# Altium PCB Pannel3.5x2 Ver1.0.PcbDoc (part 3 of 4)
Units mil, origin at the board's own origin, x right, y up, seen from the top; angles counter-clockwise.
Board outline 4133.86 x 2283.46 mil, 4 copper layers (SIGNAL, GROUND, PWR, SIGNAL (Bottom)), stack 61.627 mil thick; 222 components, 165 nets, 808 pads, 673 vias.
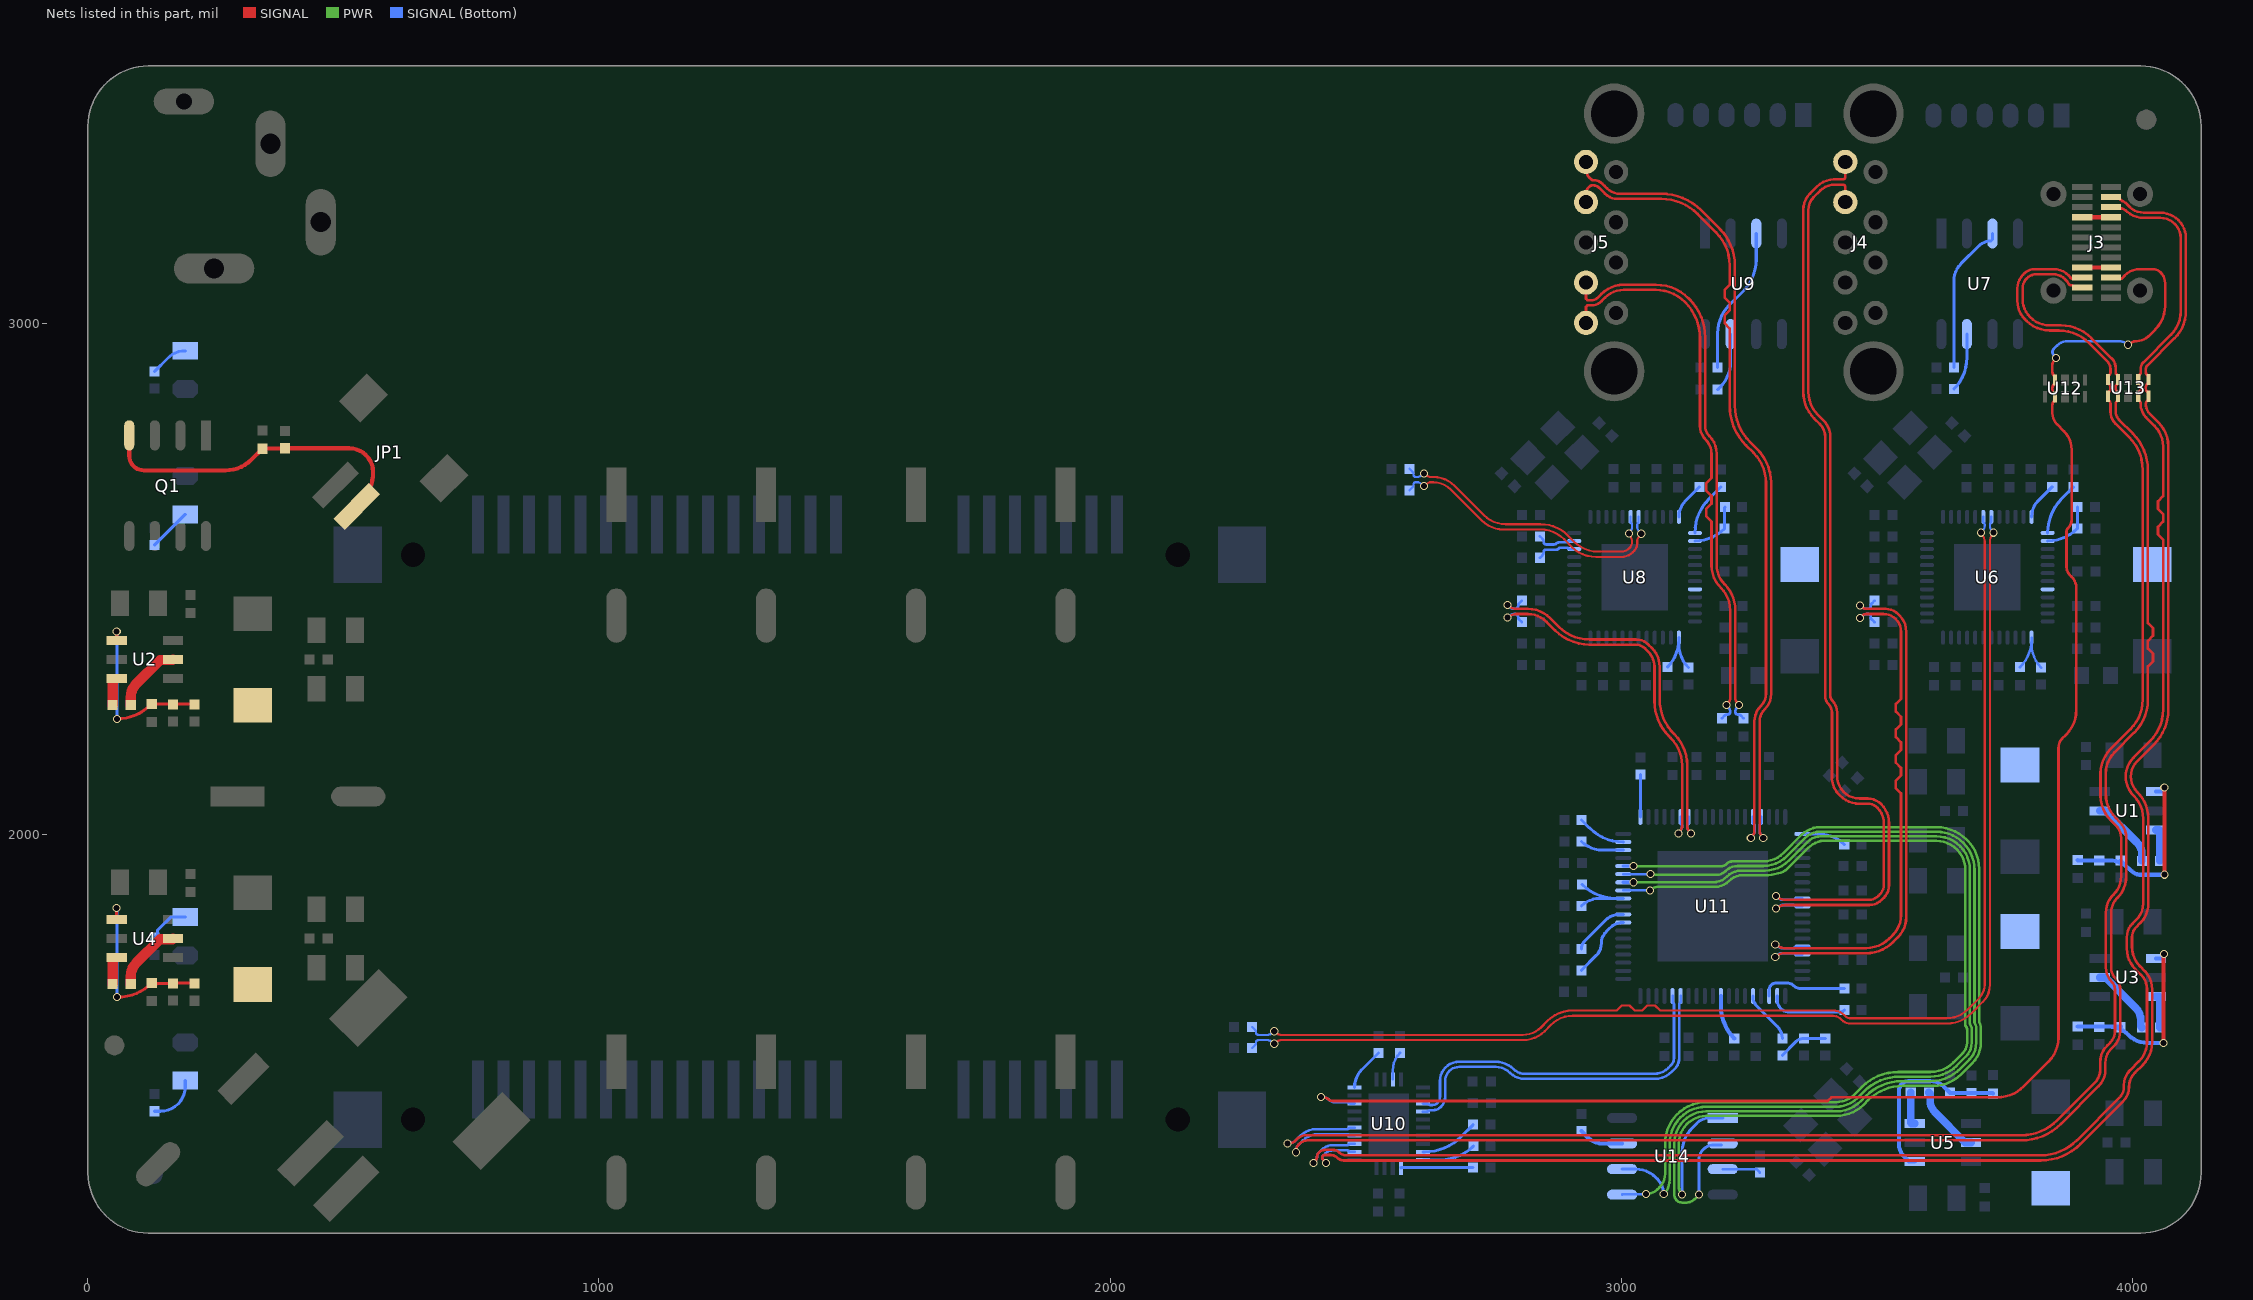
[diagram p5: the nets of this part, all layers, seen from the top]

## Via types
v1: diameter 15.75, hole 11.81, SIGNAL to SIGNAL (Bottom), tented both sides, 673 vias

## Nets (pads, with @x,y where several pads share a name; then routed paths per layer and width w, separated by ;. In a path a pad name is that pad's centre, name@x,y a point inside that pad or via, vN(x,y) a via of type N, cw(c..) or ccw(c..) an arc to the next point about the centre after c; other vN are vias at no path point) (continued)
IN_SSRX2_P: J3.A10 U10.8 U12.4 U12.7 | length 3393
  SIGNAL w5.1: v1(2412.74,1485.74) ccw(c2414.71,1487.71) 2414.71,1484.92 2418.96,1484.92 cw(c2418.96,1473.53) 2427.01,1481.59 ccw(c2435.07,1489.64) 2435.07,1478.25 3403.53,1478.25 3410.83,1485.54 3735.72,1485.54 ccw(c3735.72,1558.36) 3787.18,1506.84 3836.13,1555.79 ccw(c3790.11,1601.8) 3855.19,1601.8 3855.19,2169.64 cw(c3879.98,2169.64) 3862.45,2187.17 3869.71,2194.43 ccw(c3820.49,2243.65) 3869.77,2194.48 ccw(c3820.49,2243.65) 3890.1,2243.65 3890.1,2481.25 ccw(c3857.41,2481.25) 3880.53,2504.36 3877.17,2507.72 ; v1@3846.99,2927.27 ccw(c3855.63,2918.63) 3843.41,2918.63 3843.41,2904.57 ccw(c3853.61,2904.57) 3846.4,2897.36 3846.82,2897.36 3847.51,2896.66 cw(c3845.84,2894.99) 3848.2,2894.99 U12.4@3848.2,2888.78 3848.2,2882.58 cw(c3845.84,2882.58) 3847.51,2880.9 3846.82,2880.21 3846.4,2880.21 ccw(c3853.61,2873) 3843.41,2873 3843.41,2869.58 ccw(c3848.51,2869.58) 3844.91,2865.98 3846.4,2864.48 3846.82,2864.48 cw(c3843.47,2861.13) 3848.2,2861.13 U12.7@3848.2,2855.91 3848.2,2849.7 cw(c3845.84,2849.7) 3847.51,2848.03 3846.82,2847.34 3846.4,2847.34 ccw(c3853.61,2840.12) 3843.41,2840.12 3843.41,2823.49 ccw(c3873.46,2823.49) 3852.21,2802.25 3866.25,2788.21 cw(c3830.65,2752.61) 3881,2752.61 3881,2616.08 cw(c3856.66,2616.08) 3873.86,2598.86 ccw(c3881.08,2591.67) 3870.89,2591.67 3870.89,2522.88 ccw(c3892.34,2522.88) 3877.15,2507.74 ; J3.A10@3958.34,3089.1 3968.74,3089.1 cw(c3968.74,3080.92) 3974.52,3086.71 3975.48,3086.54 3976.57,3086.54 ccw(c3976.57,3091.64) 3980.65,3088.58 cw(c4014.64,3063.51) 4014.64,3105.75 4040.17,3105.75 cw(c4040.17,3085.55) 4054.45,3099.83 4055.38,3098.91 cw(c4035.04,3078.57) 4063.8,3078.57 4063.8,3033.82 cw(c3999.05,3033.82) 4044.83,2988.04 4031.13,2974.33 cw(c4008.36,2997.1) 4008.36,2964.9 4008.27,2964.9 ccw(c4008.27,2943.27) 4006.1,2964.79 ccw(c4008.27,2943.27) 3992.97,2958.56 cw(c3991,2960.54) v1(3991,2957.75)
  SIGNAL (Bottom) w5.1: v1@2418.62,1484.92 cw(c2418.62,1472.71) 2425.2,1483 cw(c2418.62,1472.71) 2427.25,1481.35 2428.04,1480.55 ccw(c2438.57,1491.09) 2428.7,1479.94 ccw(c2438.57,1491.09) 2438.57,1476.19 2463.4,1476.19 cw(c2463.4,1471.37) 2466.81,1474.78 ccw(c2470.23,1478.19) 2470.23,1473.37 U10.8@2478.07,1473.37 ; v1@3849.75,2933.97 cw(c3847.77,2932) v1(3850.57,2932) ; v1@3849.75,2933.97 3845.78,2937.94 cw(c3851.51,2943.67) 3843.51,2942.42 cw(c3851.51,2943.67) 3843.41,2943.67 cw(c3851.51,2943.67) 3845.78,2949.38 3852.37,2955.98 cw(c3873.93,2934.38) 3873.93,2964.9 3973.73,2964.9 cw(c3973.73,2943.27) 3989.03,2958.56 ccw(c3991,2960.54) v1(3991,2957.75)
IN_SSTX1_N: J3.A3 U10.3 U13.2 U13.9 | length 3713.3
  SIGNAL w5.1: v1(2397.59,1357) cw(c2400.38,1357) v1@2398.41,1358.97 ; v1@2398.41,1358.97 2401.77,1362.34 ccw(c2394.6,1369.52) 2404.75,1369.52 cw(c2414.89,1369.52) 2407.71,1376.69 2409.24,1378.22 cw(c2419.88,1367.58) 2419.88,1382.62 2435.73,1382.62 cw(c2435.73,1364.49) 2448.55,1377.31 ccw(c2461.37,1390.14) 2461.37,1372 3820.32,1372 ccw(c3820.32,1472) 3891.03,1401.29 3974.48,1484.74 ccw(c3953.57,1505.64) 3983.14,1505.64 3983.14,1509.83 cw(c4022.81,1509.83) 3994.74,1537.86 ; J3.A3@3958.34,3226.9 ccw(c3961.21,3229.77) 3961.21,3225.71 3970.7,3225.71 cw(c3970.7,3198.75) 3989.77,3217.81 3989.82,3217.76 3989.88,3217.76 ccw(c4021.97,3255.67) 4021.97,3206 4054.42,3206 cw(c4054.42,3165.98) 4082.7,3194.3 cw(c4054.42,3165.98) 4094.45,3165.98 4094.45,3023.58 cw(c4029.42,3023.58) 4075.4,2977.6 4021.28,2923.48 ccw(c4033.78,2910.99) 4016.11,2910.99 4016.11,2903.55 cw(c4011.01,2903.55) 4014.61,2899.94 4013.12,2898.45 4012.7,2898.45 ccw(c4016.05,2895.1) 4011.31,2895.1 U13.2@4011.31,2889.87 4011.31,2883.67 ccw(c4013.68,2883.67) 4012.01,2882 4012.7,2881.3 4013.12,2881.3 cw(c4005.91,2874.09) 4016.11,2874.09 4016.11,2870.67 cw(c4011.01,2870.67) 4014.61,2867.07 4013.12,2865.57 4012.7,2865.57 ccw(c4016.05,2862.22) 4011.31,2862.22 U13.9@4011.31,2857 4011.31,2850.8 ccw(c4013.68,2850.8) 4012.01,2849.12 4012.7,2848.43 U13.9@4013.12,2848.43 ; 3994.76,1537.88 4012.94,1556.06 ccw(c3975.74,1593.26) 4028.35,1593.26 4028.35,1697.27 ccw(c3988.8,1697.27) 4016.78,1725.22 ; 4002,2076 cw(c4039.01,2112.94) 3986.72,2112.94 3986.72,2113.03 cw(c4039.04,2113.03) 3986.72,2113.13 cw(c4039.04,2113.03) 4002.03,2150.02 ; 4002.03,2075.97 cw(c3956.24,2030.18) 4021,2030.18 4021,1864.73 cw(c3976.47,1864.73) 4007.97,1833.25 3999.97,1825.25 ccw(c4026.46,1798.77) 3999.91,1825.19 ccw(c4026.46,1798.77) 3989,1798.85 ccw(c4026.46,1798.77) 3989,1798.77 3989,1775.88 ccw(c4044.25,1775.88) 4005.18,1736.82 4016.77,1725.23 ; 4002.04,2150.03 4034.51,2182.49 ccw(c3972.96,2244.04) 4060,2244.04 4060,2561.5 4060,2576.5 4050,2586.5 4050,2601.5 4060,2611.5 4060,2626.5 4050,2636.5 4050,2651.5 4060,2661.5 4060,2705 4060,2758.7 ccw(c4003.2,2758.7) 4043.37,2798.85 4026.73,2815.49 ; U13.9@4013.12,2848.42 cw(c4005.91,2841.22) 4016.11,2841.22 4016.11,2841.14 ccw(c4052.38,2841.14) 4026.7,2815.52
  SIGNAL (Bottom) w5.1: v1@2401.77,1362.34 ccw(c2394.6,1369.52) 2404.75,1369.52 cw(c2414.89,1369.52) 2407.71,1376.69 2413.82,1382.79 cw(c2435.59,1361.02) 2435.59,1391.81 2463.41,1391.81 ccw(c2463.41,1396.62) U10.3@2466.81,1393.21 ; U10.3@2466.83,1393.23 cw(c2470.22,1389.82) 2470.22,1394.63 U10.3@2478.07,1394.63
IN_SSTX1_P: J3.A2 U10.2 U13.1 U13.10 | length 3698
  SIGNAL w5.1: v1@2421.18,1358.97 cw(c2419.21,1357) v1(2422,1357) ; v1@2421.18,1358.97 2416.34,1363.82 cw(c2419.95,1367.42) 2414.85,1367.42 cw(c2419.95,1367.42) 2416.34,1371.03 cw(c2419.95,1367.42) 2419.95,1372.52 2431.54,1372.52 cw(c2431.54,1354.39) 2444.37,1367.21 ccw(c2457.19,1380.04) 2457.19,1361.9 3820.38,1361.9 ccw(c3820.38,1471.87) 3898.14,1394.11 3981.69,1477.66 ccw(c3953.79,1505.56) 3993.24,1505.56 3993.24,1505.64 cw(c4032.91,1505.64) 4004.86,1533.69 4020.16,1549 ccw(c3976.01,1593.15) 4038.45,1593.15 4038.45,1697.33 ccw(c3988.96,1697.33) 4023.96,1732.33 4015.28,1741 ; J3.A2@3958.34,3246.58 3961.66,3246.58 cw(c3961.66,3221.33) 3979.52,3239.18 cw(c3978.03,3232.81) 3981.58,3238.31 3986.69,3235.01 cw(c3983.93,3230.73) 3987.53,3234.33 3989.83,3232.04 cw(c3986.2,3228.45) 3990.09,3231.76 ccw(c4014.64,3252.49) 3991.86,3229.82 ccw(c4014.64,3252.49) 3991.97,3229.71 ccw(c4014.64,3252.49) 3993.25,3228.51 cw(c3989.84,3224.71) 3993.37,3228.39 3994.01,3227.78 3993.95,3227.73 ccw(c4022.03,3255.8) 4022.03,3216.1 4054.56,3216.1 cw(c4054.56,3166.31) 4089.77,3201.52 4089.96,3201.33 cw(c4054.74,3166.11) 4104.55,3166.11 4104.55,3023.46 cw(c4029.7,3023.46) 4082.62,2970.54 4028.47,2916.38 ccw(c4033.93,2910.93) 4026.21,2910.93 4026.21,2903.55 ccw(c4031.31,2903.55) 4027.7,2899.94 4029.2,2898.45 4029.61,2898.45 cw(c4026.26,2895.1) 4031,2895.1 U13.1@4031,2889.87 4031,2883.67 cw(c4028.63,2883.67) 4030.31,2882 4029.61,2881.3 4029.2,2881.3 ccw(c4036.41,2874.09) 4026.21,2874.09 4026.21,2870.67 ccw(c4031.31,2870.67) 4027.7,2867.07 4029.2,2865.57 4029.61,2865.57 cw(c4026.26,2862.22) 4031,2862.22 U13.10@4031,2857 4031,2850.8 cw(c4028.63,2850.8) 4030.31,2849.12 4029.61,2848.43 U13.10@4029.2,2848.43 ; 4009.21,2083.07 cw(c4039.14,2112.99) 3996.82,2112.99 cw(c4039.14,2112.99) 4009.21,2142.92 4041.67,2175.38 ccw(c3973.05,2244) 4041.76,2175.46 ccw(c3973.05,2244) 4070.1,2244 4070.1,2758.85 ccw(c4003.58,2758.85) 4050.62,2805.89 4033.93,2822.58 ; 4009.25,2083.04 cw(c3956.42,2030.25) 4031.1,2030.25 4031.1,1864.62 cw(c3976.74,1864.62) 4015.18,1826.18 4007.14,1818.14 ccw(c4026.55,1798.73) 3999.1,1798.73 3999.1,1780.07 ccw(c4054.35,1780.07) 4015.26,1741.03 ; U13.10@4029.19,2848.42 ccw(c4036.41,2841.22) 4026.21,2841.22 ccw(c4052.57,2841.22) 4033.91,2822.59
  SIGNAL (Bottom) w5.1: 2416.33,1363.82 cw(c2419.95,1367.42) 2414.85,1367.42 cw(c2419.95,1367.42) 2416.33,1371.03 2420.93,1375.62 cw(c2435.63,1360.93) 2435.63,1381.71 2463.41,1381.71 cw(c2463.41,1376.9) U10.2@2466.81,1380.31 ; U10.2@2466.83,1380.29 ccw(c2470.22,1383.7) 2470.22,1378.89 U10.2@2478.07,1378.89
IN_SSTX2_N: J3.B2 U10.4 U13.4 U13.7 | length 3673.7
  SIGNAL w5.1: v1(2364,1378) ccw(c2362.03,1379.97) 2364.82,1379.97 2364.82,1383.88 cw(c2377.03,1383.88) 2368.4,1392.51 2370.92,1395.04 cw(c2385.66,1380.3) 2385.66,1401.14 3782.08,1401.14 ccw(c3782.08,1511.12) 3859.84,1433.35 3933.9,1507.42 ccw(c3902.28,1539.04) 3947,1539.04 3947,1553.37 cw(c3984.74,1553.37) 3958.03,1580.03 3964.07,1586.07 ccw(c3935.33,1614.81) 3975.97,1614.81 3975.97,1696.39 ccw(c3945.46,1696.39) 3967.06,1717.94 ; 3799.71,3011.7 cw(c3835.24,3047.22) 3785,3047.22 3785,3068.03 cw(c3812.62,3068.03) 3793.09,3087.56 cw(c3812.62,3068.03) 3812.62,3095.65 3845.35,3095.65 cw(c3845.35,3063.51) 3868.06,3086.26 cw(c3845.35,3063.51) 3868.11,3086.21 cw(c3845.35,3063.51) 3871.81,3081.76 3875.47,3076.45 ; 3799.74,3011.67 ccw(c3838.13,3050.11) 3838.13,2995.79 3859.88,2995.79 cw(c3859.88,2911.79) 3919.27,2971.19 3959.42,2931.03 cw(c3940.75,2912.37) 3967.15,2912.37 3967.15,2903.55 ccw(c3972.25,2903.55) 3968.65,2899.94 3970.14,2898.45 3970.56,2898.45 cw(c3967.21,2895.1) 3971.94,2895.1 U13.4@3971.94,2889.87 3971.94,2883.67 cw(c3969.58,2883.67) 3971.25,2882 3970.56,2881.3 3970.14,2881.3 ccw(c3977.35,2874.09) 3967.15,2874.09 3967.15,2870.67 ccw(c3972.25,2870.67) 3968.65,2867.07 3970.14,2865.57 3970.56,2865.57 cw(c3967.21,2862.22) 3971.94,2862.22 U13.7@3971.94,2857 3971.94,2850.8 cw(c3969.58,2850.8) 3971.25,2849.12 3970.56,2848.43 U13.7@3970.14,2848.43 ; 3875.48,3076.45 ccw(c3879.7,3079.31) 3879.7,3074.21 cw(c3879.7,3066.03) J3.B2@3885.47,3071.83 ; J3.B2@3885.49,3071.8 ccw(c3891.26,3077.6) 3891.26,3069.42 J3.B2@3901.65,3069.42 ; 3964.58,2159.95 ccw(c4005.58,2119) 3947.63,2119 3947.63,2080.12 ccw(c4016.37,2080.12) 3967.77,2031.52 3974.93,2024.36 cw(c3943.61,1993.04) 3987.9,1993.04 3987.9,1918.11 cw(c3927.02,1918.11) 3970.13,1875.13 cw(c3927.02,1918.11) 3970.07,1875.07 ccw(c3998.96,1846.18) 3958.1,1846.18 3958.1,1739.54 ccw(c3988.61,1739.54) 3967.02,1717.98 ; 3964.61,2159.98 4003.42,2198.78 ccw(c3938.99,2263.21) 4030.1,2263.21 4030.1,2313.5 4030.1,2328.5 4040.1,2338.5 4040.1,2353.5 4030.1,2363.5 4030.1,2378.5 4040.1,2388.5 4040.1,2403.5 4030.1,2413.5 4030.1,2428.5 4030.1,2713 ccw(c3929.75,2713) 4000.71,2783.96 3974.05,2810.62 ; U13.7@3970.14,2848.42 ccw(c3977.35,2841.22) 3967.15,2841.22 3967.15,2827.27 ccw(c3990.71,2827.27) 3974.04,2810.63
  SIGNAL (Bottom) w5.1: v1@2364.82,1383.88 cw(c2377.03,1383.88) 2368.4,1392.51 2376.95,1401.07 cw(c2406.25,1371.78) 2406.25,1413.2 2463.4,1413.2 cw(c2463.4,1408.38) 2466.81,1411.79 ccw(c2470.23,1415.2) 2470.23,1410.38 U10.4@2478.07,1410.38
IN_SSTX2_P: J3.B3 U10.5 U13.5 U13.6 | length 3671.4
  SIGNAL w5.1: v1(2346.74,1395.26) cw(c2348.71,1393.29) 2348.71,1396.08 2352.62,1396.08 ccw(c2352.62,1408.29) 2361.25,1399.65 2365.26,1403.66 cw(c2383.57,1385.35) 2383.57,1411.24 3782.02,1411.24 ccw(c3782.02,1511.24) 3852.73,1440.53 3926.73,1514.53 ccw(c3902.17,1539.09) 3936.9,1539.09 3936.9,1553.47 cw(c3984.48,1553.47) 3950.84,1587.12 3956.86,1593.15 ccw(c3935.12,1614.89) 3965.87,1614.89 3965.87,1696.3 ccw(c3945.25,1696.3) 3959.83,1710.88 ; 3790.21,3006.92 3792.63,3004.49 ccw(c3838.04,3049.9) 3838.04,2985.69 3855.69,2985.69 cw(c3855.69,2901.69) 3915.09,2961.09 3950.8,2925.37 cw(c3935.7,2910.28) 3957.05,2910.28 3957.05,2903.55 cw(c3951.95,2903.55) 3955.56,2899.94 3954.06,2898.45 3953.65,2898.45 ccw(c3957,2895.1) 3952.26,2895.1 U13.5@3952.26,2889.87 3952.26,2883.67 ccw(c3954.63,2883.67) 3952.95,2882 3953.65,2881.3 3954.06,2881.3 cw(c3946.85,2874.09) 3957.05,2874.09 3957.05,2870.67 cw(c3951.95,2870.67) 3955.56,2867.07 3954.06,2865.57 3953.65,2865.57 ccw(c3957,2862.22) 3952.26,2862.22 U13.6@3952.26,2857 3952.26,2850.8 ccw(c3954.63,2850.8) 3952.95,2849.12 3953.65,2848.43 U13.6@3954.06,2848.43 ; 3790.2,3006.93 cw(c3827.18,3043.89) 3774.9,3043.89 3774.9,3068.12 cw(c3812.4,3068.12) 3785.88,3094.64 3788.91,3097.66 cw(c3808.43,3078.13) 3808.43,3105.75 3845.35,3105.75 cw(c3845.35,3063.51) 3875.17,3093.43 cw(c3845.35,3063.51) 3875.27,3093.33 cw(c3845.35,3063.51) 3879.31,3088.64 ccw(c3883.43,3091.64) 3883.43,3086.54 3884.52,3086.54 3885.48,3086.7 cw(c3891.26,3080.92) 3891.26,3089.1 J3.B3@3901.65,3089.1 ; U13.6@3954.07,2848.42 cw(c3946.85,2841.22) 3957.05,2841.22 3957.05,2827.19 ccw(c3990.52,2827.19) 3966.83,2803.55 3993.43,2776.96 ; 3959.82,1710.89 cw(c3988.4,1739.45) 3948,1739.45 3948,1846.28 cw(c3998.7,1846.28) 3962.85,1882.13 3962.9,1882.18 ccw(c3926.93,1918.15) 3977.8,1918.15 3977.8,1992.97 ccw(c3943.43,1992.97) 3967.76,2017.24 3957.67,2027.33 cw(c4006.27,2075.94) 3937.53,2075.94 3937.53,2119.08 cw(c4005.38,2119.08) 3937.53,2119.2 cw(c4005.38,2119.08) 3957.37,2167.02 cw(c4005.38,2119.08) 3957.41,2167.06 3996.17,2205.83 ccw(c3938.65,2263.35) 4020,2263.35 4020,2712.8 ccw(c3929.28,2712.8) 3993.46,2776.92
  SIGNAL (Bottom) w5.1: v1@2352.62,1396.08 ccw(c2352.62,1408.29) 2361.25,1399.65 2371.29,1409.69 cw(c2404.16,1376.83) 2404.16,1423.3 2463.4,1423.3 ccw(c2463.4,1428.13) 2466.81,1424.72 cw(c2470.23,1421.31) 2470.23,1426.13 U10.5@2478.07,1426.13
LXO-B: L6.1 U6.44
LXO-C: L7.1 U8.44
NetC3_1: C3.1 U1.6 | length 67.5
  SIGNAL (Bottom) w15: U1.6@4046,2008.6 4052.36,2008.6 4053.72,2007.24 C3.1@4053.72,1948
NetC3_2: C3.2 L1.1 U1.2 | length 137
  SIGNAL (Bottom) w15: U1.2@3936,2046 3946.83,2046 4008.9,1983.93 ; 4008.92,1983.91 cw(c3986.24,1961.27) 4018.28,1961.27 C3.2@4018.28,1948
NetC4_1: C4.1 U2.6 | length 50.5
  SIGNAL w20: C4.1@48.57,2253 U2.6@48.57,2303.46
NetC4_2: C4.2 L2.1 U2.2 | length 135.9
  SIGNAL w20: C4.2@84,2253 84,2268.3 cw(c120.93,2268.3) 94.81,2294.4 141.27,2340.86 165.52,2340.86 U2.2@166.67,2342
NetC9_1: C9.1 R1.2 R3.1 U1.4 | length 391.8
  SIGNAL w8: v1(4062.21,2091.65) 4062.39,2091.47 4062.39,1921.11 v1(4062.57,1920.93)
  SIGNAL (Bottom) w8: C9.1@3893,1949.72 3893.56,1949.16 3954,1949.16 cw(c3954,1894.98) 3992.29,1933.31 ; R3.1@3977,1948.61 3992.29,1933.31 ; U1.4@4046,2083.4 4056.83,2083.4 4062.21,2088.79 v1(4062.21,2091.65) ; v1(4062.57,1920.93) 4014.89,1920.93 cw(c4014.89,1943.11) 4012.13,1921.1 cw(c4014.89,1943.11) 3999.2,1927.43 cw(c4026,1965.82) 3992.89,1932.71 3992.31,1933.29
NetC10_1: C10.1 R2.2 R4.1 U2.4 | length 349.4
  SIGNAL w6: v1(56.52,2397.07) 56.52,2379.54 U2.4@56.67,2379.4 ; v1(57,2226) ccw(c57,2320.19) 102.11,2237.51 ccw(c57,2320.19) 117.67,2248.14 ccw(c57,2320.19) C10.1@123.58,2253.57 ; C10.1@123.6,2253.59 C10.1@125,2254.98 207.89,2254.98 R4.1@209,2253.87
  SIGNAL (Bottom) w6: v1(56.52,2397.07) 56.76,2396.83 56.76,2226.24 v1(57,2226)
NetC17_1: C17.1 U3.6 | length 67.5
  SIGNAL (Bottom) w15: U3.6@4046,1682.6 4052.36,1682.6 4053.72,1681.24 C17.1@4053.72,1622
NetC17_2: C17.2 L3.1 U3.2 | length 137
  SIGNAL (Bottom) w15: U3.2@3936,1720 3946.83,1720 4006.56,1660.27 ; 4006.58,1660.25 cw(c3983.9,1637.61) 4015.94,1637.61 4015.94,1624.34 C17.2@4018.28,1622
NetC18_1: C18.1 U4.6 | length 50.5
  SIGNAL w20: C18.1@48.57,1707 U4.6@48.57,1757.46
NetC18_2: C18.2 L4.1 U4.2 | length 135.9
  SIGNAL w20: C18.2@84,1707 84,1722.3 cw(c120.93,1722.3) 94.81,1748.4 141.27,1794.86 165.52,1794.86 U4.2@166.67,1796
NetC23_1: C23.1 R5.2 R7.1 U3.4 | length 395.4
  SIGNAL w8: v1(4060.33,1592) 4061.01,1592.68 4061.01,1764.98 v1(4061.69,1765.66)
  SIGNAL (Bottom) w8: C23.1@3893,1623.72 3952.67,1623.72 ; R7.1@3977,1623.72 3952.67,1623.72 ; U3.4@4046,1757.4 4056.83,1757.4 4061.69,1762.26 v1(4061.69,1765.66) ; v1(4060.33,1592) 4029.25,1592 cw(c4029.25,1644.25) 3992.31,1607.29 ccw(c3952.67,1567.67) 3952.67,1623.72
NetC24_1: C24.1 R6.2 R8.1 U4.4 | length 365.8
  SIGNAL w6: v1(55.87,1855.98) 55.87,1834.19 U4.4@56.67,1833.4 ; v1(56.94,1681.29) 58.14,1681.29 ccw(c58.14,1775.84) 104.48,1693.42 ccw(c58.14,1775.84) C24.1@117.93,1702.59 ; C24.1@125,1708.98 cw(c58.14,1775.84) C24.1@117.93,1702.59 ; R6.2@167,1708 141.63,1708 ccw(c141.63,1653.37) C24.1@117.93,1702.59 ; R6.2@167,1708.98 207.89,1708.98 R8.1@209,1707.87
  SIGNAL (Bottom) w6: v1(55.87,1855.98) 56.94,1854.91 v1(56.94,1681.29)
NetC30_1: C30.1 U5.6 | length 67.5
  SIGNAL (Bottom) w15: C30.1@3566.28,1495 3566.28,1435.76 3567.64,1434.4 U5.6@3574,1434.4
NetC30_2: C30.2 L5.1 U5.2 | length 137
  SIGNAL (Bottom) w15: C30.2@3601.72,1495 3604.06,1492.66 3604.06,1479.39 ccw(c3636.1,1479.39) 3613.42,1456.75 ; 3613.44,1456.73 3673.17,1397 U5.2@3684,1397
NetC33_1: C33.1 R9.2 R10.1 U5.4 | length 358.9
  SIGNAL (Bottom) w8: U5.4@3574,1359.6 3563.17,1359.6 3553.19,1369.58 cw(c3577.29,1393.67) 3543.21,1393.67 3543.21,1498.28 cw(c3561.92,1498.28) 3548.69,1511.51 cw(c3561.92,1498.28) 3561.92,1516.99 3604.44,1516.99 cw(c3604.44,1478.42) 3631.7,1505.69 R10.1@3643,1494.39 3643.56,1493.84 3726.44,1493.84 C33.1@3727,1493.28
NetC36_2: C36.2 JP1.1 Q1.4 R11.2 | length 651.5
  SIGNAL w8: Q1.4@81,2780.43 81,2740.45 ccw(c109.45,2740.45) 89.33,2720.33 ccw(c109.45,2740.45) 109.45,2712 269.15,2712 ccw(c269.15,2784.18) 320.15,2733.11 ccw(c269.15,2784.18) 320.19,2733.14 C36.2@341.33,2754.28 341.82,2754.78 384.84,2754.78 R11.2@385.33,2755.27 511.45,2755.27 cw(c511.45,2708.72) 544.36,2741.64 ; JP1.1@526.13,2641.37 532.91,2648.16 ccw(c472.35,2708.72) 554.5,2684.5 ccw(c472.35,2708.72) 558,2708.72 ccw(c511.45,2708.72) 544.4,2741.6
NetC45_2: C45.2 R16.2 U6.38 | length 106.6
  SIGNAL (Bottom) w6: U6.38@3834.11,2573.87 ccw(c3834.11,2655.37) 3891.74,2597.74 ccw(c3889.04,2600.44) 3892.86,2600.44 R16.2@3892.86,2640
NetC48_1: C48.1 R18.2 U6.1 | length 124.4
  SIGNAL (Bottom) w5: C48.1@3780,2327 ccw(c3725.4,2381.6) U6.1@3802.61,2381.6 ; U6.1@3802.61,2384.89 U6.1@3802.61,2381.6 ; R18.2@3821.39,2326.14 cw(c3866.7,2371.46) 3802.61,2371.46 U6.1@3802.61,2381.6
NetC67_2: C67.2 R22.2 U8.38 | length 106.6
  SIGNAL (Bottom) w6: U8.38@3144.11,2573.87 ccw(c3144.11,2655.37) 3201.74,2597.74 C67.2@3202,2598 3202,2637.93 cw(c3204.93,2637.93) R22.2@3202.86,2640
NetC70_1: C70.1 R24.2 U8.1 | length 124.4
  SIGNAL (Bottom) w6: C70.1@3090,2327 ccw(c3035.4,2381.6) U8.1@3112.61,2381.6 ; U8.1@3112.61,2384.89 U8.1@3112.61,2381.6 ; R24.2@3131.39,2326.14 cw(c3176.7,2371.46) 3112.61,2371.46 U8.1@3112.61,2381.6
NetC91_1: C91.1 R30.1 U11.68 | length 158.9
  SIGNAL (Bottom) w6: R30.1@2922,1860 cw(c2957.49,1824.51) 2957.49,1874.7 U11.68@2988.91,1874.7 ; C91.1@2923,1902 ccw(c2988.91,1967.91) U11.68@2988.91,1874.7 ; U11.68@3003.8,1874.7 U11.68@2988.91,1874.7
NetJ3_A4: J3.A4 J3.B9 | length 56.7
  SIGNAL w8: J3.B9@3901.65,3207.21 J3.A4@3958.34,3207.21
NetJ3_A9: J3.A9 J3.B4 | length 56.7
  SIGNAL w8: J3.B4@3901.65,3108.79 J3.A9@3958.34,3108.79
NetLED1_1: LED1.1 R12.2 | length 81.9
  SIGNAL (Bottom) w6: R12.2@130.61,1797.71 136.37,1803.47 136.37,1812.37 141.65,1817.65 161.94,1837.94 LED1.1@190.62,1837.94
NetLED2_1: LED2.1 R13.2 | length 99
  SIGNAL (Bottom) w6: R13.2@130.61,1458.25 142.19,1458.25 ccw(c142.19,1506.67) 176.43,1472.43 ccw(c142.19,1506.67) 190.61,1506.67 LED2.1@190.61,1518.03
NetLED3_1: LED3.1 R14.2 | length 74.6
  SIGNAL (Bottom) w6: R14.2@130.61,2905.71 156.82,2931.91 ; 156.83,2931.93 cw(c190.62,2898.11) 160.5,2935.23 cw(c190.62,2898.11) LED3.1@190.62,2945.92
NetLED4_1: LED4.1 R15.2 | length 84.7
  SIGNAL (Bottom) w6: R15.2@130.85,2566.25 130.85,2566.48 137.46,2573.09 137.69,2573.09 LED4.1@190.61,2626.01
NetR17_2: R17.2 U6.37 | length 107.2
  SIGNAL (Bottom) w6: U6.37@3834.11,2589.61 cw(c3929.12,2589.61) 3861.94,2656.79 R17.2@3885,2679.86
NetR19_2: R19.2 U6.36 | length 73.6
  SIGNAL (Bottom) w6: U6.36@3802.61,2621.11 cw(c3846.94,2621.11) 3815.6,2652.45 R19.2@3843,2679.86
NetR20_2: R20.2 U7.7 | length 114.4
  SIGNAL (Bottom) w6: R20.2@3650.46,2871 ccw(c3588.82,2932.65) 3676,2932.65 U7.7@3676,2978.57
NetR21_2: R21.2 U7.3 | length 298.5
  SIGNAL (Bottom) w6: R21.2@3650.46,2913 3650.46,3081.65 cw(c3700.35,3081.65) 3665.05,3116.9 ; 3665.08,3116.92 3698.77,3150.62 cw(c3723.3,3126.09) 3709.89,3158.08 cw(c3723.3,3126.09) 3723.3,3160.78 3726,3163.48 U7.3@3726,3175.43
NetR23_2: R23.2 U8.37 | length 107.2
  SIGNAL (Bottom) w6: U8.37@3144.11,2589.61 cw(c3239.12,2589.61) 3171.94,2656.79 R23.2@3195,2679.86
NetR25_2: R25.2 U8.36 | length 73.6
  SIGNAL (Bottom) w6: U8.36@3112.61,2621.11 cw(c3156.94,2621.11) 3125.6,2652.45 R25.2@3153,2679.86
NetR26_2: R26.2 U9.7 | length 116.1
  SIGNAL (Bottom) w6: R26.2@3188.46,2870 3193.17,2874.7 ccw(c3142.87,2925) 3214,2925 U9.7@3214,2978.57
NetR27_1: R27.1 U9.3 | length 286.5
  SIGNAL (Bottom) w6: R27.1@3188.46,2913 3188.46,2980 cw(c3266.84,2980) 3211.4,3035.4 3238,3062 ccw(c3175.23,3124.77) 3264,3124.77 U9.3@3264,3175.43
NetR28_2: R28.2 U10.24 | length 105.8
  SIGNAL (Bottom) w6: U10.24@2611.93,1363.13 2645.65,1363.13 ccw(c2645.65,1454.87) R28.2@2710.52,1390 ccw(c2645.65,1454.87) R28.2@2710.52,1390
NetR29_2: R29.2 U10.23 | length 116
  SIGNAL (Bottom) w6: U10.23@2611.93,1378.88 2615.73,1378.88 ccw(c2615.73,1478.88) 2686.44,1408.17 R29.2@2710.27,1432
NetR31_1: R31.1 U11.66 | length 112.4
  SIGNAL (Bottom) w6: R31.1@2922,1776 cw(c2943.73,1776) 2928.36,1791.36 2969,1832 cw(c2996.28,1804.72) 2996.28,1843.3 U11.66@3003.8,1843.3
NetR32_1: R32.1 U11.74 | length 86.3
  SIGNAL (Bottom) w6: R32.1@2922,1986 ccw(c2962.56,2026.56) 2962.56,1969.2 U11.74@3003.8,1969.2
NetR33_1: R33.1 U11.65 | length 132
  SIGNAL (Bottom) w6: R33.1@2922,1734 2951.1,1763.1 ccw(c2927.2,1787) 2961,1787 cw(c2992.38,1787) 2970.19,1809.19 2977.68,1816.68 cw(c3003.8,1790.56) U11.65@3003.8,1827.5
NetR34_1: R34.1 U10.25 | length 141.9
  SIGNAL (Bottom) w6: U10.25@2568.62,1347.38 2569.24,1348 R34.1@2710.27,1348
NetR35_1: R35.1 U11.75 | length 95.6
  SIGNAL (Bottom) w6: R35.1@2922,2028 2937.56,2012.44 ccw(c3003.8,2078.67) U11.75@3003.8,1985
NetR36_2: R36.2 U10.13 | length 55.4
  SIGNAL (Bottom) w5: U10.13@2552.88,1520.62 2552.88,1538.18 cw(c2601.09,1538.18) R36.2@2567,1572.27
NetR37_2: R37.2 U10.10 | length 84.7
  SIGNAL (Bottom) w6: U10.10@2478.07,1504.87 cw(c2527.48,1504.87) 2492.52,1539.78 ; 2492.54,1539.81 R37.2@2525,1572.27
NetR38_1: R38.1 U11.1 | length 82.9
  SIGNAL (Bottom) w6: U11.1@3037.3,2034.2 R38.1@3037.3,2117.11
NetR39_1: R39.1 U11.47 | length 89.9
  SIGNAL (Bottom) w8: U11.47@3194.7,1683.8 3194.7,1664.38 ccw(c3284.49,1664.38) R39.1@3221,1600.89
NetR40_1: R40.1 R41.2 R42.1 | length 97
  SIGNAL (Bottom) w6: R41.2@3315,1567.43 3342.43,1594.86 cw(c3357,1580.28) R42.1@3357,1600.89 R40.1@3399,1600.89
NetR41_1: R41.1 U11.43 | length 104.2
  SIGNAL (Bottom) w6: U11.43@3257.7,1683.8 3257.7,1681.62 ccw(c3282.62,1681.62) 3265,1664 3305.73,1623.27 cw(c3283.35,1600.89) R41.1@3315,1600.89
NetR43_1: R43.1 U11.41 | length 169.4
  SIGNAL (Bottom) w6: U11.41@3289.2,1683.8 3289.2,1694.81 cw(c3303.95,1694.81) 3289.56,1698.04 cw(c3303.95,1694.81) 3293.52,1705.24 ; 3293.53,1705.26 cw(c3303.09,1695.68) 3303.09,1709.21 3323.97,1709.21 cw(c3323.97,1690.08) 3337.49,1703.61 ccw(c3351.02,1717.13) 3351.02,1698 R43.1@3436.27,1698
NetR44_1: R44.1 U11.40 | length 153.9
  SIGNAL (Bottom) w6: U11.40@3305,1683.8 3305,1676.01 ccw(c3329.16,1676.01) 3305.15,1673.29 ccw(c3329.16,1676.01) 3312.06,1658.94 ; 3312.09,1658.91 ccw(c3328.79,1675.64) 3328.79,1652 3426.61,1652 ccw(c3426.61,1665.66) R44.1@3436.27,1656
NetR45_1: R45.1 U11.20 | length 87.4
  SIGNAL (Bottom) w6: U11.20@3354.2,2000.7 3386.14,2000.7 cw(c3386.14,1930.03) R45.1@3436.11,1980
NetR46_1: R46.1 U14.3 | length 75.7
  SIGNAL (Bottom) w5: U14.3@3198.43,1345 3264.27,1345 R46.1@3271,1338.27 R46.1@3270.73,1338
NetR47_2: R47.2 U14.7 | length 87.9
  SIGNAL (Bottom) w8: R47.2@2922,1419.27 2934.07,1407.2 ccw(c2963.2,1436.33) 2963.2,1395.13 3001.44,1395.13 U14.7@3001.57,1395
RX1_N: C41.2 U8.31 | length 568.6
  SIGNAL w4.29: v1(2614,2681.8) ccw(c2614,2684.65) 2616.01,2682.63 2618.71,2685.33 cw(c2627.23,2676.8) 2627.23,2688.86 2632,2688.86 cw(c2632,2640.22) 2666.39,2674.61 2727.01,2613.99 ccw(c2769.37,2656.34) 2769.37,2596.44 2841.88,2596.44 cw(c2841.88,2530.88) 2888.24,2577.24 2903.24,2562.24 ccw(c2950.38,2609.38) 2903.27,2562.2 ccw(c2950.38,2609.38) 2950.38,2542.71 3000.59,2542.71 ccw(c3000.59,2573.29) 3022.22,2551.67 3025.29,2554.74 ccw(c3011.15,2568.87) 3031.14,2568.87 3031.14,2573 cw(c3045.49,2573) 3035.35,2583.14 v1@3038.18,2585.97 ; v1@3038.18,2585.98 ccw(c3036.16,2587.99) v1(3039.01,2587.99)
  SIGNAL (Bottom) w4.29: C41.2@2585.72,2673 2591.42,2678.71 ccw(c2586.6,2683.52) 2593.41,2683.52 2593.41,2684.56 cw(c2597.7,2684.56) 2593.63,2685.92 cw(c2597.7,2684.56) 2594.67,2687.6 cw(c2597.7,2684.56) 2596.35,2688.63 cw(c2597.7,2684.56) 2597.7,2688.85 2600.77,2688.86 cw(c2600.77,2676.8) v1@2609.29,2685.33 ; U8.31@3033.87,2621.11 3033.87,2612.23 cw(c3029.22,2612.23) 3032.51,2608.93 ccw(c3035.8,2605.64) 3031.14,2605.64 3031.14,2601.23 ccw(c3043.2,2601.23) v1@3034.67,2592.71
RX1_P: C43.2 U8.30 | length 553.6
  SIGNAL w4.29: v1(2614,2706.2) cw(c2614,2703.35) 2616.01,2705.37 2618.71,2702.67 ccw(c2627.23,2711.2) 2627.23,2699.14 2632.06,2699.14 cw(c2632.06,2640.37) 2673.62,2681.93 2731.28,2624.28 ; 2731.29,2624.27 ccw(c2773.63,2666.63) 2773.63,2606.73 2842.04,2606.73 cw(c2842.04,2531.27) 2895.4,2584.63 2907.5,2572.53 ccw(c2954.65,2619.67) 2907.54,2572.49 ccw(c2954.65,2619.67) 2954.65,2553 3000.51,2553 ccw(c3000.51,2573.49) 3015,2559 3016.01,2560.01 ; v1(3014.61,2588.21) ccw(c3019.42,2588.21) 3016.01,2584.81 cw(c3004.33,2573.12) 3020.86,2573.12 3020.86,2571.71 ; 3016.04,2560.04 ccw(c3004.31,2571.71) 3020.86,2571.71 ; 3020.86,2568.74 3020.86,2571.71
  SIGNAL (Bottom) w4.29: C43.2@2585.72,2715 2591.42,2709.29 cw(c2586.6,2704.48) 2593.41,2704.48 2593.41,2703.44 ccw(c2597.7,2703.44) 2593.63,2702.08 ccw(c2597.7,2703.44) 2594.67,2700.4 ccw(c2597.7,2703.44) 2596.35,2699.37 ccw(c2597.7,2703.44) 2597.7,2699.15 2600.77,2699.14 ccw(c2600.77,2711.2) v1@2609.29,2702.67 ; v1@3017.33,2592.71 ccw(c3008.8,2601.23) 3020.86,2601.23 3020.86,2605.64 ccw(c3016.2,2605.64) 3019.49,2608.93 cw(c3022.78,2612.23) 3018.13,2612.23 U8.30@3018.13,2621.11
RX2_N: C42.2 U6.31 | length 2421.8
  SIGNAL w4.29: v1@2325.71,1593.83 cw(c2334.23,1585.3) 2334.23,1597.36 2807.68,1597.36 ccw(c2807.68,1657.24) 2850.03,1614.9 2862.57,1627.43 cw(c2904.97,1585.03) 2904.97,1645 3413.77,1645 cw(c3413.77,1622.77) 3429.48,1638.5 3431.05,1636.93 ; 3431.08,1636.9 ccw(c3448.48,1654.35) 3448.48,1629.71 3636.07,1629.71 ccw(c3636.07,1698.85) 3684.96,1649.96 3707.3,1672.3 ccw(c3673.89,1705.72) 3707.37,1672.37 ccw(c3673.89,1705.72) 3721.14,1705.72 3721.14,2572.96 cw(c3742.39,2572.96) 3727.37,2587.98 ccw(c3725.35,2590) v1(3728.2,2590)
  SIGNAL (Bottom) w4.29: C42.2@2277.72,1582 2283.59,1587.88 ccw(c2279.2,1592.27) 2285.41,1592.27 2285.41,1593.07 cw(c2289.7,1593.07) 2286.67,1596.1 cw(c2289.7,1593.06) 2289.7,1597.36 2307.77,1597.36 cw(c2307.77,1585.3) 2316.29,1593.83 2318.98,1591.13 ccw(c2321,1593.15) v1(2321,1590.3) ; U6.31@3723.87,2621.11 3723.87,2612.23 cw(c3719.22,2612.23) 3722.51,2608.93 ccw(c3725.8,2605.64) 3721.14,2605.64 3721.14,2603.23 ccw(c3733.2,2603.23) v1@3724.67,2594.71
RX2_P: C44.2 U6.30 | length 2422.2
  SIGNAL w4.29: v1@2325.71,1611.17 ccw(c2334.23,1619.7) 2334.23,1607.64 2807.63,1607.64 ccw(c2807.63,1657.37) 2842.77,1622.19 ; 2842.79,1622.21 2855.32,1634.74 cw(c2904.93,1585.12) 2855.4,1634.82 cw(c2904.93,1585.12) 2904.93,1655.29 2976,1655.29 2991,1655.29 3001,1665.29 3016,1665.29 3026,1655.29 3041,1655.29 3051,1665.29 3066,1665.29 3076,1655.29 3105,1655.29 3413.83,1655.29 cw(c3413.83,1622.9) 3436.73,1645.8 3438.27,1644.26 ccw(c3448.57,1654.57) 3448.57,1640 3636,1640 ccw(c3636,1699.02) 3677.73,1657.29 3700,1679.55 ; 3700.03,1679.58 ccw(c3673.79,1705.76) 3710.86,1705.76 3710.86,2572.96 ccw(c3689.61,2572.96) 3704.63,2587.98 cw(c3706.65,2590) v1(3703.8,2590)
  SIGNAL (Bottom) w4.29: C44.2@2277.72,1623 2283.6,1617.12 cw(c2279.2,1612.73) 2285.41,1612.73 2285.41,1611.94 ccw(c2289.7,1611.94) 2286.67,1608.9 ccw(c2289.7,1611.94) 2289.7,1607.65 2307.77,1607.64 ccw(c2307.77,1619.7) 2316.29,1611.17 2318.98,1613.87 cw(c2321,1611.85) v1(2321,1614.7) ; v1@3707.33,2594.71 ccw(c3698.8,2603.23) 3710.86,2603.23 3710.86,2605.64 ccw(c3706.2,2605.64) 3709.49,2608.93 cw(c3712.78,2612.23) 3708.13,2612.23 U6.30@3708.13,2621.11
SPICLK: U11.70 U14.6 | length 1976.7
  PWR w5: v1(3023.93,1906.25) 3179.44,1906.25 ccw(c3179.44,1945.09) 3206.9,1917.63 ; v1(3083,1296) ccw(c3054.93,1324.07) 3093,1312.82 ccw(c3054.93,1324.07) 3094.63,1324.07 3094.63,1395.13 cw(c3166.5,1395.13) 3115.62,1445.89 cw(c3166.5,1395.13) 3115.68,1445.95 cw(c3166.5,1395.13) 3166.5,1467 3419.99,1467 ccw(c3419.99,1526.72) 3462.19,1484.46 ccw(c3419.99,1526.72) 3462.25,1484.52 3474.44,1496.71 cw(c3545.15,1426) 3545.15,1526 3604.73,1526 ccw(c3604.73,1598.42) 3655.92,1547.19 ccw(c3604.73,1598.42) 3655.96,1547.24 3674.53,1565.8 ccw(c3648.31,1592) 3685.37,1592 3685.37,1619.05 ccw(c3671.37,1619.05) 3682.87,1627.03 cw(c3687,1629.85) 3682.51,1627.65 cw(c3687,1629.85) 3682,1629.82 3682,1930.35 ccw(c3616.35,1930.35) 3663.39,1976.15 ccw(c3616.35,1930.35) 3662.77,1976.77 ccw(c3616.35,1930.35) 3662.72,1976.82 ccw(c3616.35,1930.35) 3616.35,1996 3605.15,1996 cw(c3605.15,2001) 3605.05,1996 3600,1996.1 3390.55,1996.1 ccw(c3390.55,1959.45) 3364.65,1985.38 ; 3206.9,1917.62 cw(c3234.36,1890.16) 3234.36,1929 3280.89,1929 ccw(c3280.89,1995.11) 3327.61,1948.33 ; 3327.64,1948.36 3364.64,1985.36
  SIGNAL (Bottom) w6: U14.6@3001.57,1345 3028.37,1345 cw(c3028.37,1290.37) 3066.98,1329.02 3070.98,1325.02 cw(c3041.96,1296) v1(3083,1296) ; U11.70@3003.8,1906.2 v1(3023.93,1906.25) ; v1(3023.93,1906.25) v1@3025.18,1905
SPICS: U11.72 U14.1 | length 2095.3
  PWR w5: v1(3023.93,1937.75) 3195.03,1937.75 ccw(c3195.03,1953.54) 3206.18,1942.36 ; v1(3119,1295) cw(c3134.39,1310.39) 3114.6,1301.33 cw(c3134.39,1310.39) 3112.63,1310.39 3112.63,1395.13 cw(c3166.5,1395.13) 3128.38,1433.19 cw(c3166.5,1395.13) 3166.5,1449 3419.99,1449 ccw(c3419.99,1526.72) 3474.88,1471.7 ccw(c3419.99,1526.72) 3475.01,1471.83 3483.03,1479.85 cw(c3551,1411.87) 3483.07,1479.88 cw(c3551,1411.87) 3551,1508 3610.33,1508 ccw(c3610.33,1584.9) 3664.67,1530.49 ; 3206.21,1942.39 cw(c3217.36,1931.21) 3217.36,1947 3278.06,1947 ccw(c3278.06,2001.94) 3316.91,1963.09 3352.92,1999.1 cw(c3389.14,1962.86) 3389.14,2014.1 3605.18,2014.1 cw(c3605.18,2005.1) 3605.99,2014.06 ccw(c3606.4,2019.05) 3606.3,2014.05 3609.2,2014 3615.16,2014 3616.36,2014 cw(c3616.35,1930.35) 3661.39,2000.84 cw(c3616.35,1930.35) 3675.43,1989.57 cw(c3616.35,1930.35) 3675.57,1989.43 cw(c3616.35,1930.35) 3675.63,1989.37 3677,1988 cw(c3621.47,1932.47) 3700,1932.47 3700,1634.45 ccw(c3705,1634.48) 3700.44,1632.42 cw(c3671.37,1619.05) 3703.37,1619.05 3703.37,1592 cw(c3648.31,1592) 3687.29,1553.1 cw(c3648.31,1592) 3687.23,1553.05 3664.71,1530.52
  SIGNAL (Bottom) w6: U11.72@3003.8,1937.7 v1@3023.9,1937.72 ; v1(3023.93,1937.75) v1@3025,1936.68 ; v1(3119,1295) 3119,1378.42 cw(c3185.58,1378.42) 3138.5,1425.5 3148.25,1435.25 cw(c3171.79,1411.71) 3171.79,1445 U14.1@3198.43,1445
SPISI: U11.69 U14.5 | length 1920.1
  PWR w5: v1(3048,1296) ccw(c3048,1328.01) 3070.63,1305.37 3074.57,1309.31 ccw(c3047.89,1336) 3085.63,1336 3085.63,1395.13 cw(c3166.5,1395.13) 3109.24,1452.24 cw(c3166.5,1395.13) 3109.31,1452.31 cw(c3166.5,1395.13) 3166.5,1476 3419.99,1476 ccw(c3419.99,1526.72) 3455.84,1490.84 3470.71,1505.71 cw(c3541.42,1435) 3541.42,1535 3604.73,1535 ccw(c3604.73,1598.42) 3649.58,1553.58 3668.15,1572.15 ccw(c3648.31,1592) 3676.37,1592 3676.37,1619.05 ccw(c3671.37,1619.05) 3675.33,1622.1 ccw(c3671.37,1619.05) 3675.17,1622.29 cw(c3682,1628.16) 3673,1628.16 3673,1930.35 ccw(c3616.35,1930.35) 3656.44,1970.37 ; v1(3056,1890) cw(c3073.5,1872.5) 3060.79,1893.73 cw(c3073.5,1872.5) 3073.5,1897.25 3183.16,1897.25 ccw(c3183.16,1936.09) 3210.62,1908.63 ; 3210.63,1908.62 cw(c3238.09,1881.16) 3238.09,1920 3280.89,1920 ccw(c3280.89,1995.11) 3294.45,1921.23 3307.07,1923.55 ccw(c3301,1956.8) 3324.89,1932.89 3365.24,1973.24 cw(c3398.47,1940) 3379.44,1982.98 3385.78,1985.78 cw(c3392,1971.72) 3392,1987.1 cw(c3392,1971.72) 3392.24,1987.1 3398.47,1987 3616.35,1987 cw(c3616.35,1930.35) 3656.37,1970.44
  SIGNAL (Bottom) w5: U14.5@3001.57,1295 3002.07,1295.5 3047.5,1295.5 v1(3048,1296) ; U11.69@3003.8,1890.5 3004.05,1890.25 3055.75,1890.25 v1(3056,1890)
SPISO: U11.71 U14.2 | length 2068.6
  PWR w5: v1(3056.86,1922) ccw(c3059.27,1924.41) 3059.27,1921 3187.1,1921 ccw(c3187.1,1944.9) 3204,1928 3204.37,1928.37 cw(c3227.63,1905.1) 3227.63,1938 3278.06,1938 ccw(c3278.06,2001.94) 3323.25,1956.7 ccw(c3278.06,2001.94) 3323.3,1956.75 3359.27,1992.73 cw(c3389.14,1962.86) 3389.14,2005.1 3605.18,2005.1 ; v1(3152,1295) 3142.86,1285.86 cw(c3127.81,1300.9) 3127.81,1279.63 3119,1279.63 cw(c3119,1295) 3106.18,1286.52 cw(c3119,1295) 3103.63,1295 3103.63,1395.13 cw(c3166.5,1395.13) 3122,1439.54 cw(c3166.5,1395.13) 3122.05,1439.59 cw(c3166.5,1395.13) 3166.5,1458 3419.99,1458 ccw(c3419.99,1526.72) 3468.53,1478.08 ccw(c3419.99,1526.72) 3468.63,1478.18 3478.17,1487.71 cw(c3548.88,1417) 3548.88,1517 3604.73,1517 ccw(c3604.73,1598.42) 3656.85,1535.87 3659.68,1538.22 3680.9,1559.44 ccw(c3648.31,1592) 3694.37,1592 3694.37,1619.05 ccw(c3671.37,1619.05) 3691.59,1630.02 cw(c3696,1632.37) 3691.03,1631.86 cw(c3696,1632.37) 3691,1632.34 3691,1930.35 ccw(c3616.35,1930.35) 3669.2,1983.07 ccw(c3616.35,1930.35) 3669.09,1983.19 ; 3605.18,2005 3616.35,2005 cw(c3616.35,1930.35) 3669.07,1983.2
  SIGNAL (Bottom) w5: U11.71@3003.8,1922 v1(3056.86,1922)
  SIGNAL (Bottom) w6: v1(3152,1295) 3152,1362.71 cw(c3181.67,1362.71) 3160.67,1383.67 ; 3160.71,1383.71 cw(c3181.67,1362.71) 3181.67,1392.38 U14.2@3195.81,1392.38
SSRX1_N: C86.1 U11.7 | length 754.9
  SIGNAL w5.1: v1(2777,2448.2) cw(c2777,2445.41) 2778.97,2447.39 ccw(c2794.27,2462.68) 2794.27,2441.05 2817.12,2441.05 cw(c2817.12,2379.3) 2860.78,2422.97 2877.8,2405.95 ccw(c2937.78,2465.93) 2937.78,2381.1 3028.56,2381.1 cw(c3028.56,2345.8) 3053.52,2370.76 3059.7,2364.59 cw(c3022.76,2327.64) 3075,2327.64 3075,2264.18 ccw(c3170.83,2264.18) 3103.07,2196.42 3103.8,2195.69 cw(c3043.07,2134.97) 3128.95,2134.97 3128.95,2015.37 ccw(c3141.16,2015.37) 3132.53,2006.73 v1@3135.29,2003.97 ; v1@3135.29,2003.97 cw(c3133.31,2002) v1(3136.1,2002)
  SIGNAL (Bottom) w5.1: v1@2781.73,2444.63 ccw(c2790.37,2453.26) 2790.37,2441.05 2792.89,2441.05 ccw(c2792.89,2446.15) 2796.5,2442.54 ccw(c2792.89,2446.15) 2797.99,2446.15 2797.99,2446.87 cw(c2804.83,2446.87) 2799.99,2451.7 C86.1@2805.28,2457 ; U11.7@3131.8,2034.2 3131.8,2023.65 cw(c3126.93,2023.65) 3130.38,2020.21 ccw(c3133.82,2016.77) 3128.95,2016.77 3128.95,2015.37 ccw(c3141.16,2015.37) v1@3132.53,2006.73
SSRX1_P: C85.1 U11.6 | length 739.4
  SIGNAL w5.1: v1(2777,2423.8) ccw(c2777,2426.59) 2778.97,2424.61 cw(c2794.27,2409.32) 2794.27,2430.95 2817,2430.95 cw(c2817,2379.02) 2853.71,2415.75 2870.66,2398.8 ccw(c2937.78,2465.93) 2870.71,2398.75 ccw(c2937.78,2465.93) 2937.64,2371 ccw(c2937.78,2465.93) 2937.78,2371 3028.45,2371 cw(c3028.45,2345.53) 3046.46,2363.54 3052.5,2357.5 ; 3052.53,2357.47 cw(c3022.56,2327.56) 3064.9,2327.56 3064.9,2260 ccw(c3160.73,2260) 3092.95,2192.26 3096.6,2188.6 cw(c3042.9,2134.9) 3118.85,2134.9 3118.85,2015.37 cw(c3106.64,2015.37) 3115.27,2006.73 v1@3112.51,2003.97 ; v1(3111.7,2002) cw(c3114.49,2002) v1@3112.51,2003.97
  SIGNAL (Bottom) w5.1: v1@2781.73,2427.37 cw(c2790.37,2418.74) 2790.37,2430.95 2792.89,2430.95 cw(c2792.89,2425.85) 2796.5,2429.46 cw(c2792.89,2425.85) 2797.99,2425.85 2797.99,2425.13 ccw(c2804.83,2425.13) 2799.99,2420.3 C85.1@2805.28,2415 ; v1@3115.27,2006.73 ccw(c3106.64,2015.37) 3118.85,2015.37 3118.85,2016.77 ccw(c3113.98,2016.77) U11.6@3117.42,2020.21 ; U11.6@3116,2034.2 3116,2023.65 ccw(c3120.87,2023.65) U11.6@3117.43,2020.21
SSRX2_N: J5.5 U11.16 | length 1588.8
  SIGNAL w5.1: J5.5@2930.9,3315.5 2930.9,3300.86 ccw(c2953.83,3300.86) 2935.02,3287.74 ccw(c2953.83,3300.86) 2937.62,3284.65 2940.21,3282.06 ccw(c2945.98,3287.83) 2945.98,3279.67 cw(c2945.98,3255.44) 2963.03,3272.65 2967.09,3268.59 2972.25,3263.42 ; 2972.28,3263.4 ccw(c2997.18,3288.35) 2997.18,3253.1 3078.52,3253.1 cw(c3078.52,3143.32) 3156.15,3220.95 3192.61,3184.49 cw(c3121.4,3113.28) 3222.1,3113.28 3222.1,2838.62 ccw(c3322.1,2838.62) 3251.39,2767.91 3265.78,2753.52 cw(c3199.75,2687.48) 3293.13,2687.48 3293.13,2275 cw(c3250,2275) 3280.5,2244.5 ccw(c3304.55,2220.45) 3270.54,2220.45 3270.54,2055.82 ; 3270.52,2055.8 3270.52,2006.24 ccw(c3282.74,2006.24) 3270.54,2005.63 ccw(c3282.74,2006.24) 3274.1,1997.61 3276.86,1994.85 cw(c3274.88,1992.87) v1(3277.68,1992.87)
  SIGNAL (Bottom) w5.1: U11.16@3272.07,2020.21 ccw(c3268.63,2023.65) 3273.5,2023.65 U11.16@3273.5,2034.2 ; U11.16@3272.08,2020.21 ccw(c3275.52,2016.77) 3270.65,2016.77 3270.65,2006.19 ccw(c3282.86,2006.19) v1@3274.23,1997.55
SSRX2_P: J5.6 U11.15 | length 1588.8
  SIGNAL w5.1: J5.6@2930.9,3236.7 2930.9,3253.8 cw(c2946.69,3253.8) 2935.52,3264.96 2938.06,3267.5 cw(c2943.05,3262.5) 2943.05,3269.57 2945.98,3269.57 cw(c2945.98,3255.44) 2955.96,3265.44 2968.07,3253.32 ; 2968.08,3253.31 ccw(c2992.99,3278.25) 2992.99,3243 3078.39,3243 cw(c3078.39,3143) 3149.1,3213.71 3185.41,3177.41 cw(c3121.2,3113.2) 3212,3113.2 3212,3090 3212,3075 3202,3065 3202,3050 3212,3040 3212,3025 3202,3015 3202,3000 3212,2990 3212,2942 3212,2838.58 ccw(c3322.01,2838.58) 3244.16,2760.85 ccw(c3322.01,2838.58) 3244.22,2760.79 3258.51,2746.51 ; v1(3253.27,1992.82) cw(c3256.06,1992.82) 3254.09,1994.79 3256.84,1997.55 ccw(c3248.21,2006.19) 3260.42,2006.19 3260.42,2059.98 ; 3258.53,2746.48 cw(c3199.29,2687.29) 3283.03,2687.29 3283.03,2275.1 cw(c3249.76,2275.1) 3273.29,2251.57 ccw(c3304.31,2220.55) 3260.44,2220.55 3260.44,2060
  SIGNAL (Bottom) w5.1: v1@3256.97,1997.55 ccw(c3248.34,2006.19) 3260.44,2004.53 ccw(c3248.34,2006.19) 3260.55,2006.19 3260.55,2016.77 ccw(c3255.68,2016.77) U11.15@3259.12,2020.21 ; U11.15@3257.7,2034.2 3257.7,2023.65 ccw(c3262.57,2023.65) U11.15@3259.13,2020.21
SSRX3_N: J4.6 U11.29 | length 1823.3
  SIGNAL w5.1: v1(3303,1854.65) ccw(c3303,1857.44) 3304.97,1855.46 cw(c3320.27,1840.17) 3320.27,1861.8 3485.18,1861.8 ccw(c3485.18,1896.16) 3509.46,1871.84 ; 3412.71,2261.58 cw(c3421.44,2270.29) 3409.1,2270.29 3409.1,2776.78 ccw(c3362.25,2776.78) 3395.38,2809.91 3384.59,2820.69 cw(c3429.48,2865.58) 3366,2865.58 3366,3221.24 cw(c3401.76,3221.24) 3376.45,3246.5 3388.91,3258.96 cw(c3418.09,3229.78) 3418.09,3271.05 3433.08,3271.05 cw(c3433.08,3265.95) 3436.68,3269.56 cw(c3433.08,3265.95) 3438.18,3265.95 J4.6@3438.18,3236.7 ; 3412.73,2261.55 cw(c3389.89,2238.74) 3422.17,2238.74 3422.17,2114.28 ccw(c3466.77,2114.28) 3435.21,2082.77 ; 3435.23,2082.74 ccw(c3466,2113.51) 3466,2070 3482.17,2070 cw(c3482.17,2033.25) 3508.15,2059.24 3508.3,2059.09 cw(c3471.14,2021.93) 3523.69,2021.93 3523.69,1900.67 cw(c3488.45,1900.67) 3513.37,1875.75 3509.48,1871.86
  SIGNAL (Bottom) w5.1: v1@3307.73,1858.22 cw(c3316.37,1849.59) 3316.37,1861.8 3336.86,1861.8 cw(c3336.86,1857.02) 3340.24,1860.4 ccw(c3343.62,1863.78) 3343.62,1859 U11.29@3354.2,1859
SSRX3_P: J4.5 U11.28 | length 1823.9
  SIGNAL w5.1: v1(3303,1879.05) cw(c3303,1876.26) 3304.97,1878.24 ccw(c3320.27,1893.53) 3320.27,1871.9 3484.72,1871.9 ccw(c3484.72,1897.28) 3502.66,1879.33 3506.17,1882.83 ccw(c3488.24,1900.76) 3513.59,1900.76 3513.59,2021.79 ccw(c3470.79,2021.79) 3501.08,2052.03 ; 3369.26,3253.6 ccw(c3401.63,3221.29) 3355.9,3221.39 ccw(c3401.63,3221.29) 3355.9,3221.29 3355.9,2865.53 ccw(c3429.37,2865.53) 3377.37,2813.63 ccw(c3429.37,2865.53) 3377.42,2813.58 3388.21,2802.79 ; 3369.3,3253.63 3383.25,3267.58 cw(c3416,3234.83) 3416,3281.15 3433.08,3281.15 ccw(c3433.08,3286.25) 3436.68,3282.64 ccw(c3433.08,3286.25) 3438.18,3286.25 J4.5@3438.18,3315.5 ; 3388.24,2802.76 cw(c3362.16,2776.74) 3399,2776.74 3399,2270.22 ccw(c3421.27,2270.22) 3405.49,2254.51 ; 3405.54,2254.46 cw(c3389.76,2238.69) 3412.07,2238.69 3412.07,2110.1 ccw(c3456.67,2110.1) 3425.11,2078.59 ; 3425.13,2078.56 3428.13,2075.56 ccw(c3465.94,2113.38) 3465.94,2059.9 3482.07,2059.9 cw(c3482.07,2033.01) 3501.06,2052.05
  SIGNAL (Bottom) w5.1: v1@3307.73,1875.48 ccw(c3316.37,1884.11) 3316.37,1871.9 3336.86,1871.9 ccw(c3336.86,1876.68) 3340.24,1873.3 cw(c3343.62,1869.92) 3343.62,1874.7 U11.28@3354.2,1874.7
SSRX4_N: C64.1 U11.35 | length 1072.3
  SIGNAL w5.1: v1(3301.14,1760.2) ccw(c3301.14,1762.99) 3303.12,1761.01 cw(c3318.41,1745.72) 3318.41,1767.35 3478.8,1767.35 ccw(c3478.8,1842.13) 3531.67,1789.25 3541.17,1798.75 ; v1@3472.54,2443.71 ccw(c3478.97,2450.14) 3478.97,2441.05 3516.95,2441.05 cw(c3516.95,2406.57) 3541.33,2430.95 3544.38,2427.9 cw(c3513.08,2396.6) 3557.35,2396.6 3557.35,1837.81 cw(c3502.11,1837.81) 3541.2,1798.78
  SIGNAL (Bottom) w5.1: v1@3296.97,1761.01 cw(c3295,1762.99) 3295,1760.2 v1(3301.14,1760.2) ccw(c3301.14,1762.99) 3303.12,1761.01 3305.88,1763.77 cw(c3314.51,1755.14) 3314.51,1767.35 3336.77,1767.35 cw(c3336.77,1762.48) U11.35@3340.21,1765.92 ; v1@3296.97,1761.01 v1@3298.65,1762.69 ; U11.35@3340.21,1765.93 ccw(c3343.65,1769.37) 3343.65,1764.5 U11.35@3354.2,1764.5 ; v1(3466.95,2447.78) 3467,2448.2 cw(c3467,2445.41) v1@3468.97,2447.39 ; v1@3468.97,2447.39 3471.73,2444.63 ccw(c3480.37,2453.26) 3480.37,2441.05 3482.89,2441.05 ccw(c3482.89,2446.15) 3486.5,2442.54 ccw(c3482.89,2446.15) 3487.99,2446.15 3487.99,2446.87 cw(c3494.83,2446.87) 3489.99,2451.7 C64.1@3495.28,2457
SSRX4_P: C63.1 U11.34 | length 1085.3
  SIGNAL w5.1: v1(3301.14,1784.6) cw(c3301.14,1781.81) 3303.12,1783.79 ccw(c3318.41,1799.08) 3318.41,1777.45 3478.74,1777.45 ccw(c3478.74,1842.26) 3524.54,1796.4 ; v1@3472.54,2428.29 cw(c3478.97,2421.86) 3478.97,2430.95 3512.77,2430.95 cw(c3512.77,2396.47) 3537.13,2420.87 cw(c3512.77,2396.47) 3547.25,2396.47 3547.25,2323 3547.25,2265 3537.25,2255 3537.25,2240 3547.25,2230 3547.25,2215 3537.25,2205 3537.25,2190 3547.25,2180 3547.25,2165 3537.25,2155 3537.25,2140 3547.25,2130 3547.25,2115 3537.25,2105 3537.25,2090 3547.25,2080 3547.25,2065 3547.25,1841.99 cw(c3492.01,1841.99) 3531.07,1802.93 3524.57,1796.43
  SIGNAL (Bottom) w5.1: v1@3296.97,1783.79 ccw(c3295,1781.81) 3295,1784.6 v1(3301.14,1784.6) cw(c3301.14,1781.81) 3303.12,1783.79 3305.88,1781.03 ccw(c3314.51,1789.66) 3314.51,1777.45 3336.77,1777.45 ccw(c3336.77,1782.32) U11.34@3340.21,1778.88 ; v1@3296.97,1783.79 v1@3298.65,1782.11 ; U11.34@3340.21,1778.87 cw(c3343.65,1775.43) 3343.65,1780.3 U11.34@3354.2,1780.3 U11.34@3366.76,1780.3 ; v1(3467,2423.37) 3467,2423.8 ccw(c3467,2426.59) v1@3468.97,2424.61 ; v1@3468.97,2424.61 3471.73,2427.37 cw(c3480.37,2418.74) 3480.37,2430.95 3482.89,2430.95 cw(c3482.89,2425.85) 3486.5,2429.46 cw(c3482.89,2425.85) 3487.99,2425.85 3487.99,2425.13 ccw(c3494.83,2425.13) 3489.99,2420.3 C63.1@3495.28,2415
SSRX_N: U10.17 U11.53 | length 697.3
  SIGNAL (Bottom) w5.1: U10.17@2611.93,1473.37 2619.77,1473.37 cw(c2619.77,1468.55) 2623.18,1471.96 ccw(c2626.6,1475.37) 2626.6,1470.54 2630.34,1470.54 ccw(c2630.34,1484.41) 2640.14,1474.6 2640.64,1475.1 ccw(c2629.65,1486.09) 2645.19,1486.09 2645.19,1517.42 cw(c2682.82,1517.42) 2645.19,1517.5 cw(c2682.82,1517.42) 2656.18,1544 ; 2656.21,1544.03 2656.27,1544.08 cw(c2682.87,1517.47) 2656.32,1544.14 cw(c2682.87,1517.47) 2682.87,1555.1 2754.07,1555.1 cw(c2754.07,1504.82) 2789.63,1540.37 ccw(c2810.9,1561.65) 2810.9,1531.56 3064.6,1531.56 ccw(c3064.6,1570.06) 3091.82,1542.84 3097.46,1548.47 ccw(c3083.85,1562.09) 3103.1,1562.09 3103.1,1666.46 ccw(c3098.32,1666.46) 3101.7,1669.84 cw(c3105.08,1673.22) 3100.3,1673.22 U11.53@3100.3,1683.8
SSRX_P: U10.18 U11.52 | length 713.4
  SIGNAL (Bottom) w5.1: U10.18@2611.93,1457.62 2619.77,1457.62 ccw(c2619.77,1462.44) 2623.18,1459.03 cw(c2626.6,1455.62) 2626.6,1460.44 2632.43,1460.44 ccw(c2632.43,1479.36) 2645.8,1465.98 2647.81,1467.98 ; 2647.84,1468.02 ccw(c2629.74,1486.05) 2655.29,1486.05 2655.29,1517.38 cw(c2682.91,1517.38) 2663.37,1536.9 ; 2663.4,1536.93 cw(c2682.91,1517.38) 2682.91,1545 2753.98,1545 cw(c2753.98,1504.6) 2782.55,1533.17 ccw(c2810.82,1561.43) 2782.62,1533.1 ccw(c2810.82,1561.43) 2810.73,1521.46 ccw(c2810.82,1561.43) 2810.82,1521.46 3064.64,1521.46 ccw(c3064.64,1569.97) 3098.94,1535.67 3104.63,1541.36 ; 3104.66,1541.39 ccw(c3083.94,1562.05) 3113.2,1562.05 3113.2,1666.46 cw(c3117.98,1666.46) 3114.6,1669.84 ccw(c3111.22,1673.22) 3116,1673.22 U11.52@3116,1683.8
SSTX1_N: C93.1 U8.22 | length 78.1
  SIGNAL (Bottom) w5.1: C93.1@2840.72,2541 2845.5,2545.78 ccw(c2839.42,2551.85) 2848.01,2551.85 cw(c2853.11,2551.85) 2849.51,2555.46 cw(c2853.11,2551.85) 2853.11,2556.95 2872.26,2556.95 ccw(c2872.26,2563.77) 2877.08,2558.95 cw(c2881.9,2554.13) 2881.9,2560.94 2892.48,2560.94 cw(c2892.48,2556.12) 2895.88,2559.53 ccw(c2899.29,2562.94) 2899.29,2558.12 U8.22@2907.89,2558.12
SSTX1_P: C92.1 U8.23 | length 78.1
  SIGNAL (Bottom) w5.1: C92.1@2840.72,2583 2845.5,2578.22 cw(c2839.42,2572.15) 2848.01,2572.15 ccw(c2853.11,2572.15) 2849.51,2568.54 ccw(c2853.11,2572.15) 2853.11,2567.05 2868.08,2567.05 ccw(c2868.08,2573.87) 2872.9,2569.05 cw(c2877.72,2564.23) 2877.72,2571.04 2892.48,2571.04 ccw(c2892.48,2575.86) 2895.88,2572.45 cw(c2899.29,2569.05) 2899.29,2573.87 U8.23@2907.89,2573.87
SSTX2_N: C97.1 J5.8 | length 1103.4
  SIGNAL w5.1: J5.8@2930.9,3079.3 2930.9,3047.94 2933.89,3044.95 2941.44,3044.95 ccw(c2941.44,3063.18) 2954.31,3050.28 2961.24,3057.21 cw(c3004.53,3013.8) 3004.53,3075.1 3067.55,3075.1 cw(c3067.55,2984.48) 3131.62,3048.56 3132.89,3047.3 cw(c3057.77,2972.18) 3132.92,3047.26 cw(c3057.77,2972.18) 3164,2972.18 3164,2799.19 ccw(c3192.75,2799.19) 3172.4,2778.88 ; 3172.42,2778.86 cw(c3138.24,2744.68) 3186.58,2744.68 3186.58,2526.48 ccw(c3239.14,2526.48) 3201.96,2489.33 ; 3201.98,2489.31 cw(c3151.1,2438.43) 3223.05,2438.43 3223.05,2266.37 ccw(c3235.26,2266.37) 3226.63,2257.73 v1@3229.39,2254.97 ; v1@3229.39,2254.97 cw(c3227.41,2253) v1(3230.2,2253)
  SIGNAL (Bottom) w5.1: v1@3226.63,2248.27 ccw(c3235.26,2239.63) 3223.05,2239.63 3223.05,2239.39 ccw(c3228.15,2239.39) 3224.54,2235.79 ccw(c3228.15,2239.39) 3228.15,2234.29 3228.87,2234.29 cw(c3228.87,2227.45) 3233.7,2232.3 C97.1@3239,2227
SSTX2_P: C96.1 J5.9 | length 1103.9
  SIGNAL w5.1: J5.9@2930.9,3000.5 2930.9,3031.86 2933.89,3034.85 2941.49,3034.85 ccw(c2941.49,3063.05) 2961.43,3043.11 2968.24,3049.93 cw(c3004.64,3013.53) 3004.64,3065 3067.37,3065 cw(c3067.37,2984.05) 3124.61,3041.29 cw(c3053.9,2970.58) 3153.9,2970.58 3153.9,2799.07 ccw(c3192.44,2799.07) 3165.19,2771.81 cw(c3137.93,2744.56) 3176.48,2744.56 3176.48,2712 3176.48,2697 3166.48,2687 3166.48,2672 3176.48,2662 3176.48,2647 3166.48,2637 3166.48,2622 3176.48,2612 3176.48,2552 3176.48,2526.31 ccw(c3238.74,2526.31) 3194.69,2482.31 ; 3194.74,2482.26 cw(c3150.69,2438.26) 3212.95,2438.26 3212.95,2266.37 cw(c3200.74,2266.37) 3209.37,2257.73 v1@3206.61,2254.97 ; v1(3205.8,2253) cw(c3208.59,2253) v1@3206.61,2254.97
  SIGNAL (Bottom) w5.1: C96.1@3197,2227 3202.3,2232.3 cw(c3207.13,2227.45) 3207.13,2234.29 3207.85,2234.29 ccw(c3207.85,2239.39) 3211.46,2235.79 ccw(c3207.85,2239.39) 3212.95,2239.39 3212.95,2239.63 ccw(c3200.74,2239.63) v1@3209.37,2248.27